# Altium PCB golgi_botV2.PcbDoc
Units mil, origin at the board's own origin, x right, y up, seen from the top; angles counter-clockwise.
Board outline 2900 x 4005 mil, 2 copper layers (Top Layer, Bottom Layer); 27 components, 37 nets, 124 pads, 27 vias.
Unrouted connection lines stored in the file: 2.
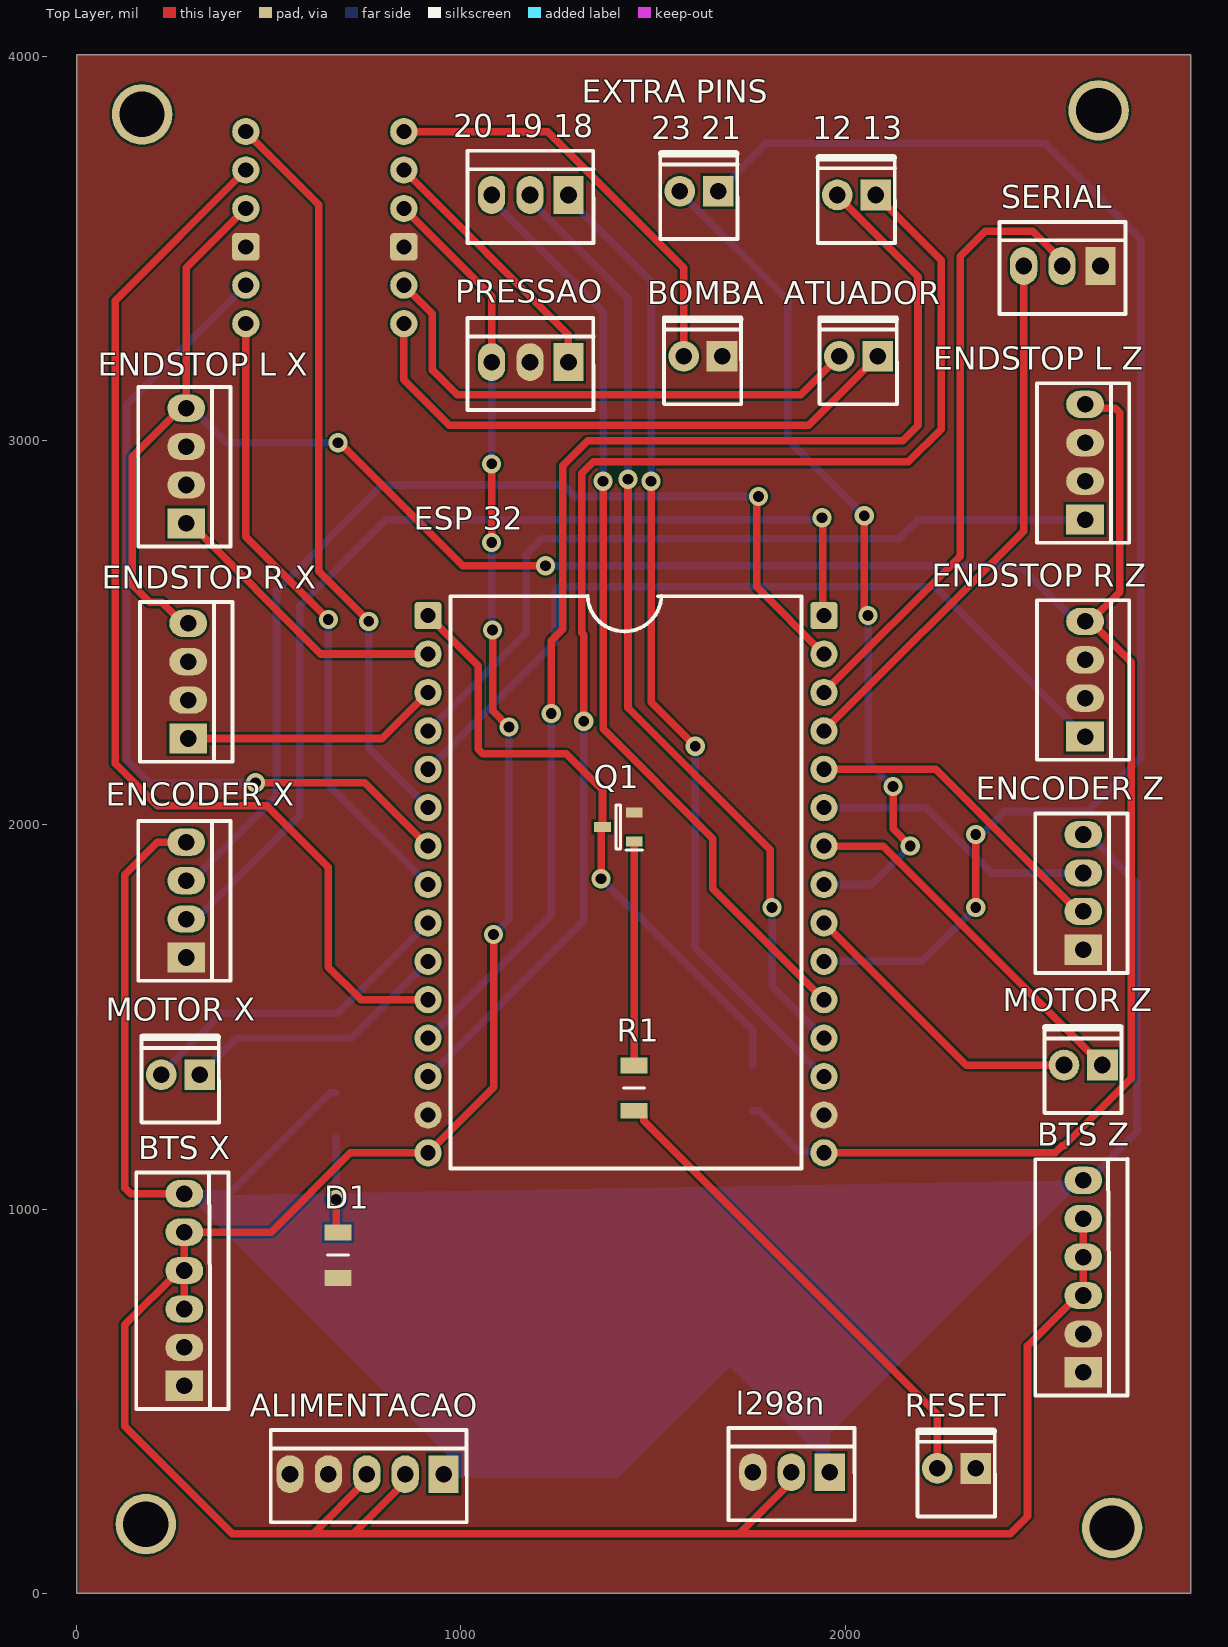
[diagram p0: Top Layer view]
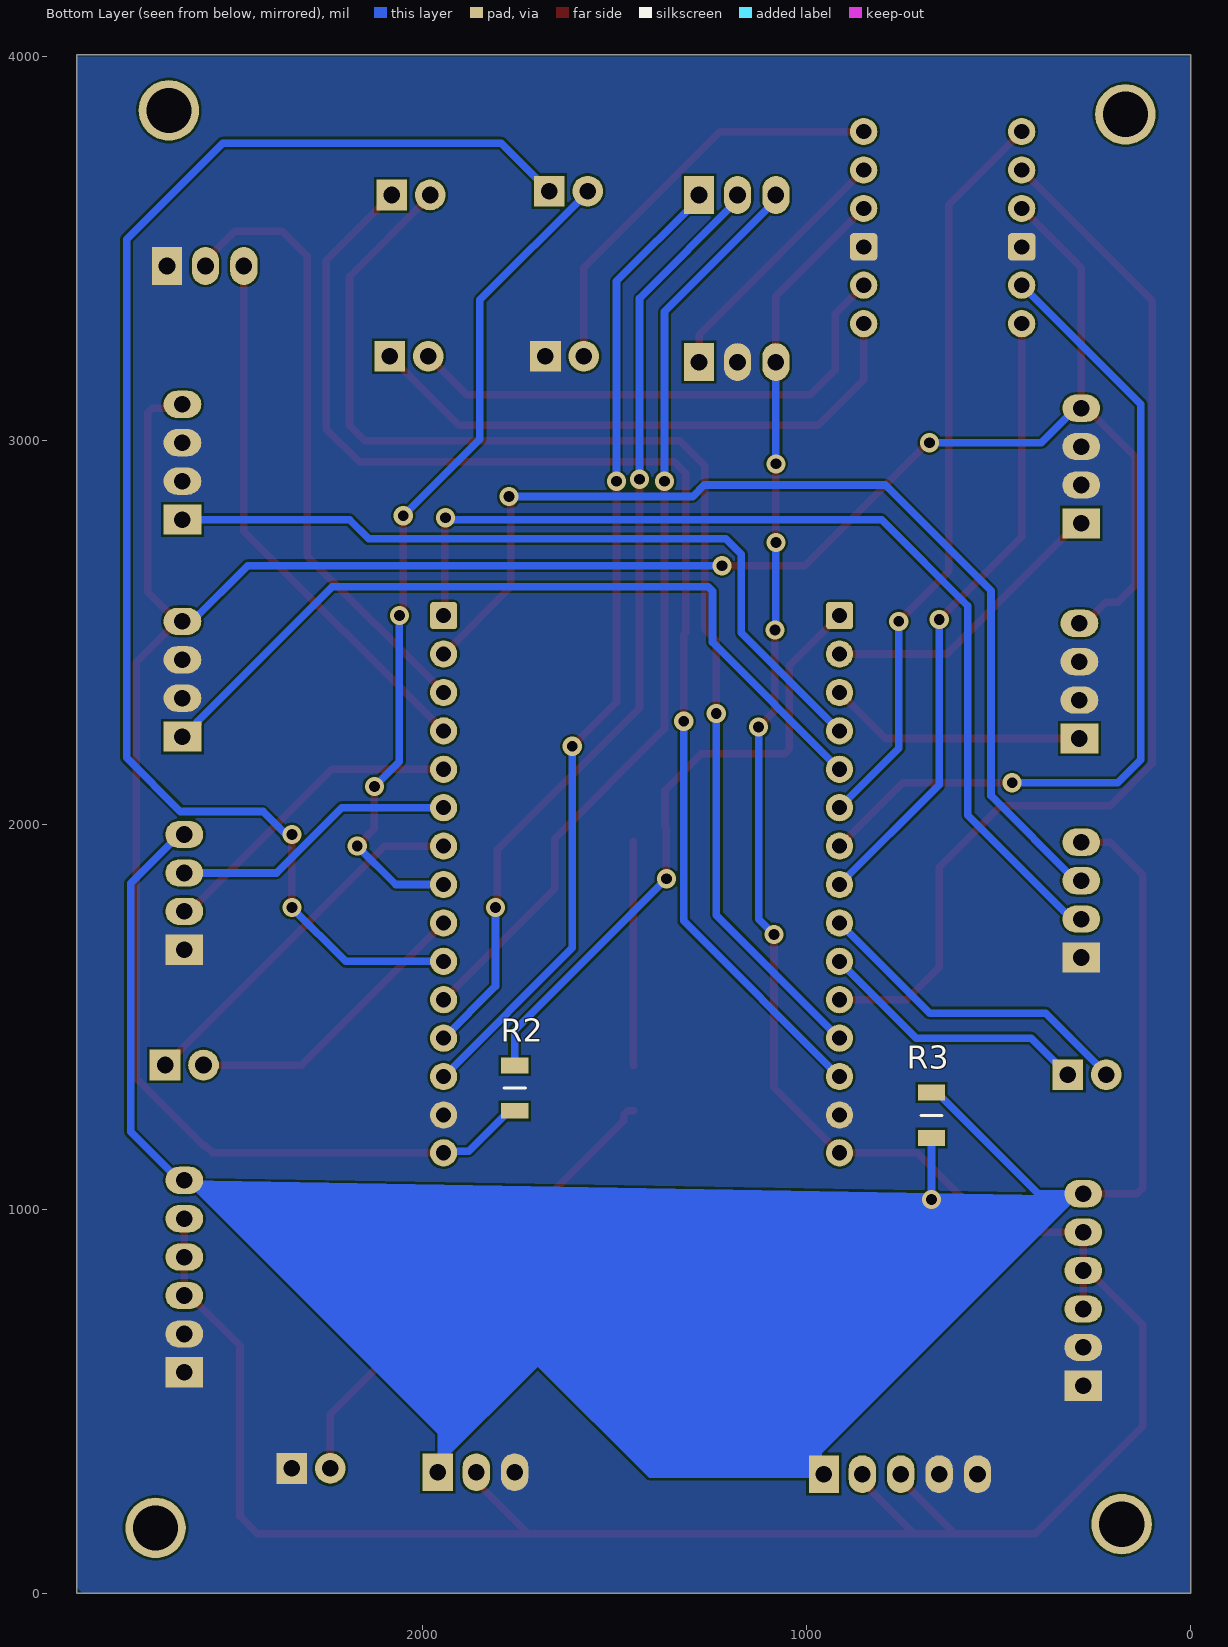
[diagram p1: Bottom Layer view, seen from below]

## Layer stack, top to bottom
Top Solder: solder mask 0.4, Solder Resist, Dk 3.5
Top Layer: signal copper 1.4
Dielectric 1: dielectric 12.6, FR-4, Dk 4.8
Bottom Layer: signal copper 1.4
Bottom Solder: solder mask 0.4, Solder Resist, Dk 3.5

## Board outline
0,0 2900,0 2900,4005 0,4005

## Design rules (kind name [scope] priority, off if disabled: settings)
Clearance [All] p1: gap=5.98 ignorepadtopadclearanceinfootprint=FALSE except(0: Arc-Hole Track-Hole SMDPad-Hole THPad-Hole Via-Hole Fill-Hole Poly-Hole Region-Hole Text-Hole)
ComponentClearance [All] p1: gap=3.94 collisioncheckmode=3 verticalgap=3.94 showdistances=FALSE
MinimumSolderMaskSliver [All] p1: minsoldermaskwidth=3.94
PolygonConnect [All] p1: connectstyle=Direct reliefconductorwidth=10 reliefentries=4 polygonreliefangle="90 Angle" airgapwidth=10
RoutingVias [All] p1: holewidth=15.75 width=31.5 viastyle="Through Hole" minholewidth=11.81 minwidth=23.62 maxholewidth=19.68 maxwidth=39.37
SilkToSilkClearance [All] p1: silktosilkclearance=0
SilkToSolderMaskClearance [IsPad] p1: minsilkscreentomaskgap=0 clearancetoexposedcopper=TRUE
SolderMaskExpansion [All] p1: expansion=3.15 istentingtop=FALSE
Width [All] p1: maxlimit=39.37 minlimit=11.81 preferedwidth=19.68
26 further rules are at their usual default settings.

## Components (designator, comment, footprint, x,y, rotation, side; value= is the part's Value field where it differs from the comment)
"12 13" "KK_2.54_2vias" KK_2VIAS_180º 2080,3640 r180 top (schematic designator "D12 D13")
"20 19 18" "KK_2.54_3vias" KK_3vias_180º 1280,3640 r180 top (schematic designator "D4 D2 D15")
"23 21" "KK_2.54_2vias" KK_2VIAS_180º 1670,3650 r180 top (schematic designator "D5 RX2")
ALIMENTACAO "KK_2.54_5vias" KK_5vias_180° 955,310 r180 top
ATUADOR "KK_2.54_2vias" KK_2VIAS_180º 2085,3220 r180 top
BOMBA "KK_2.54_2vias" KK_2VIAS_180º 1680,3220 r180 top
"BTS X" "KK_2.54_6vias" KK_6vias_180° 280,540 r90 top
"BTS Z" "KK_2.54_6vias" KK_6vias_180° 2620,575 r90 top
D1 "LED 3MM RED" "LED RED" 680,880 r270 top
"ENCODER X" "KK_2.54_4vias" KK_4vias_180° 285,1655 r90 top
"ENCODER Z" "KK_2.54_4vias" KK_4vias_180° 2620,1675 r90 top
"ENDSTOP L X" "KK_2.54_4vias" KK_4vias_180° 285,2785 r90 top
"ENDSTOP L Z" "KK_2.54_4vias" KK_4vias_180° 2625,2795 r90 top
"ENDSTOP R X" "KK_2.54_4vias" KK_4vias_180° 290,2225 r90 top
"ENDSTOP R Z" "KK_2.54_4vias" KK_4vias_180° 2625,2230 r90 top
"ESP 32" "microcontrolador" ESP32_Desvikit_v1 914.49,2545 r0 top value="ESP32 Desvikit V1"
l298n "KK_2.54_3vias" KK_3vias_180º 1960,315 r180 top
"MOTOR X" "KK_2.54_2vias" KK_2VIAS_180º 320,1350 r180 top
"MOTOR Z" "KK_2.54_2vias" KK_2VIAS_180º 2670,1375 r180 top
PRESSAO "KK_2.54_3vias" KK_3vias_180º 1280,3205 r180 top (schematic designator "SENSOR DE PRESSAO")
Q1 "Trans BC817" SOT96P240X110-3N 1410,1995 r180 top
R1 "2k2" RESC3216X60N 1450.28,1315 r270 top
R2 "2k2" RESC3216X60N 1760,1315 r270 bottom
R3 "680R" RESC3216X60N 674.72,1244.06 r270 bottom
RESET "KK_2.54_2vias" KK_2VIAS_180º 2340,325 r180 top
SERIAL "KK_2.54_3vias" KK_3vias_180º 2665,3455 r180 top
? "Conversor de nível logico 4 canais" "Conversor de nível lógico 4 canais" 383.9,3298.11 r0 top

## Footprints (in the part's own frame and the unit in brackets; to place one, negate y for a bottom-side part, rotate by r counter-clockwise, add the part's x,y. Pads: shape width x height; smd on the part's side, far side on the other; paste and mask are expansions set on the pad)
"Conversor de nível lógico 4 canais" [mm]
  round 1.8 hole 1: 1(1.425,12.875) 2(1.425,10.335) 3(1.425,7.795) 5(1.425,2.715) 6(1.425,0.175) 7(11.875,12.875) 8(11.875,10.335) 9(11.875,7.795) 11(11.875,2.715) 12(11.875,0.175)
  rrect25% 1.8x1.8 hole 1: 4(1.425,5.255) 10(11.875,5.255)
  body extent 0.14,-1.37 13.13,14.37, height 10.85
ESP32_Desvikit_v1 [mm]
  rrect25% 1.8x1.8 hole 1: 1(0,0) 30(26.175,0)
  round 1.8 hole 1: 2(0,-2.54) 3(0,-5.08) 4(0,-7.62) 5(0,-10.16) 6(0,-12.7) 7(0,-15.24) 8(0,-17.78) 9(0,-20.32) 10(0,-22.86) 11(0,-25.4) 12(0,-27.94) 13(0,-30.48) 14(0,-33.02) 15(0,-35.52) 16(26.175,-35.52) 17(26.175,-33.02) 18(26.175,-30.48) 19(26.175,-27.94) 20(26.175,-25.4) 21(26.175,-22.86) 22(26.175,-20.32) 23(26.175,-17.78) 24(26.175,-15.24) 25(26.175,-12.7) 26(26.175,-10.16) 27(26.175,-7.62) 28(26.175,-5.08) 29(26.175,-2.54)
  silkscreen extent 1.47,-36.57 24.69,1.31, body extent -1.2,-46.03 27.4,4.9, height 15.1
KK_2VIAS_180º [mil]
  rect 80x80 hole 43.31: 1(0,0)
  round 80 hole 43.31: 2(100,0)
  silkscreen extent -50,-101 151,125, body extent -61,-108 165,128, height 464
KK_3vias_180º [mm]
  rect 2x2.5 hole 1.1: 1(0,0)
  oval 1.8x2.5 hole 1.1: 2(2.54,0) 3(5.08,0)
  silkscreen extent -1.65,-2.92 6.69,3.18, body extent -1.6,-2.95 6.69,3.05, height 11.9
KK_4vias_180° [mm]
  rect 2x2.5 hole 1.1: 1(0,0)
  oval 1.8x2.5 hole 1.1: 2(2.54,0) 3(5.08,0) 4(7.62,0)
  silkscreen extent -1.53,-2.92 9.02,3.18, body extent -1.4,-2.79 8.76,3.01, height 10.12
KK_5vias_180° [mm]
  rect 2x2.5 hole 1.1: 1(0,0)
  oval 1.8x2.5 hole 1.1: 2(2.54,0) 3(5.08,0) 4(7.62,0) 5(10.16,0)
  silkscreen extent -1.53,-2.92 11.43,3.18, body extent -1.4,-2.79 11.3,3.01, height 10.12
KK_6vias_180° [mm]
  rect 2x2.5 hole 1.1: 1(0,0)
  oval 1.8x2.5 hole 1.1: 2(2.54,0) 3(5.08,0) 4(7.62,0) 5(10.16,0) 6(12.7,0)
  silkscreen extent -1.53,-2.92 14.11,3.18, body extent -1.4,-2.79 13.84,3.05, height 10.1
"LED RED" [mm]
  rect 1.05x1.8 smd: 1(-1.5,0) 2(1.5,0)
  silkscreen extent 0,-0.7 0,0.7, body extent -0.79,-0.43 0.81,0.37, height 0.75
RESC3216X60N [mm]
  rect 1.05x1.8 smd: 1(-1.5,0) 2(1.5,0)
  silkscreen extent 0,-0.7 0,0.7, body extent -1.58,-0.8 1.58,0.8, height 0.6
SOT96P240X110-3N [mm]
  rect 1.1x0.65 smd: 1(-1.05,0.96) 2(-1.05,-0.96) 3(1.05,0)
  silkscreen extent -1.6,-1.45 0.15,1.54, body extent -1.2,-1.45 1.2,1.45, height 1.1

## Part data
"12 13" "23 21" ATUADOR BOMBA "MOTOR X" "MOTOR Z" RESET: "Conector KK 2.54mm 2 vias", Descrição="Conector KK 3 vias com passo 2.54mm", Encapsulamento="PTH - 180º", Modelo="2 vias - 180º", Valor="KK 2 vias 180º"
"20 19 18" l298n PRESSAO SERIAL: "Conector KK 2.54mm 3 vias", Descrição="Conector KK 3 vias com passo 2.54mm", Encapsulamento="PTH - 180º", Modelo="3 vias - 180º", Valor="KK 3 vias 180º"
ALIMENTACAO: "Conector KK 2.54mm 5 vias", Descrição="Conector KK 3 vias com passo 2.54mm", Encapsulamento="PTH - 180º", Modelo="3 vias - 180º", Valor="KK 5 vias 180º"
"BTS X" "BTS Z": "Conector KK 2.54mm 6 vias", Descrição="Conector KK 3 vias com passo 2.54mm", Encapsulamento="PTH - 180º", Modelo="3 vias - 180º", Valor="KK 6 vias 180º"
D1: Current If Luminous Intensity=2, Forward Current If=20, Forward Voltage VF Max=2.5, LED Colour=Red, Manufacturer=Paralight, Manufacturer Part Number=IMP585, Operating Temperature Max=85, Operating Temperature Min=-40, Operating Temperature Range="-40°C to +85", Peak Forward Current=7, Supplier Part Number 1="Led 3mm Vermelho Difuso L-314HD - Paralight", Voltage Vf Typ="2.2V<!--FANDB--><div class=\"features-and-benefits-container\"><div class=\"features-and-benefits-description\"><span class=\"features-benefits-value\">The L-934LID from Kingbright is a through hole round shape high efficiency red colour LED. The device is made of gallium arsenide phosphide on gallium phosphide orange light emitting diode. This LED is widely used because of low power consumption, long life and solid state reliability.</span></div><div class=\"features-and-benefits-list\"><ul class=\"features-and-benefits-list-list\"><li class=\"features-and-benefits-list-item\">Standard bulb size of T-1 (3mm)</li><li class=\"features-and-benefits-list-item\">Reliable and rugged</li><li class=\"features-and-benefits-list-item\">Viewing angle is 60°</li><li class=\"features-and-benefits-list-item\">Luminous intensity of 3mcd at 2mA</li><li class=\"features-and-benefits-list-item\">Forward voltage is 2.0V</li><li class=\"features-and-benefits-list-item\">Forward current (If) is 20mA</li><li class=\"features-and-benefits-list-item\">Dominant wavelength is 625nm at IF=20mA</li><li class=\"features-and-benefits-list-item\">Peak wavelength is 627nm at IF=20", Bulb Size=3mm, ComponentLink1Description=http://loja.multcomercial.com.br/led-3mm-vermelho-difuso-l-314hd-paralight.html, ComponentLink1URL=http://loja.multcomercial.com.br/led-3mm-vermelho-difuso-l-314hd-paralight.html, Dominant Wavelength=625, External Diameter=2.9, External Length / Height=4.6, Forward Current If Max=20, Forward Voltage=2, Lead Cross-section Depth=0.5, Lead Cross-section Width=0.5, Lead Spacing=2.54, LED / Lamp Size="3mm / T-1", LED Mounting="Through Hole", LED Type=Standard, Lens Shape=Round, Luminous Intensity=3, Luminous Intensity @ If Min=0.7, Luminous Intensity Typ=3, Mounting Type="PCB Through Hole", MSL=-, No. of Pins=2, Packaging=Each, Peak Wavelength=625, PIV Max=5, Pricing 1="1=0.15 (BRL)", RoHS=YES, Stock 1=35260, Supplier 1="Mult Comercial", SVHC="No SVHC (15-Jun-2015)", Viewing Angle=60°, Wavelength Typ=625
"ENCODER X" "ENCODER Z" "ENDSTOP L X" "ENDSTOP L Z" "ENDSTOP R X" "ENDSTOP R Z": "Conector KK 2.54mm 4 vias", Descrição="Conector KK 3 vias com passo 2.54mm", Encapsulamento="PTH - 180º", Modelo="3 vias - 180º", Valor="KK 4 vias 180º"
"ESP 32": library part "ESP32 Desvikit v1", "microcontrolador com moculo bluethoth e wifi"
Q1: "Transistor BJT NPN BC817-25-7-F", Arrow Part Number=BC817-25-7-F, Manufacturer_Name="Diodes Inc.", Mouser Part Number=621-BC817-25-7-F, Arrow Price/Stock=https://www.arrow.com/en/products/bc817-25-7-f/diodes-incorporated, Datasheet Link=https://www.diodes.com/assets/Datasheets/ds11107.pdf, Height=1.1mm, Manufacturer_Part_Number=BC817-25-7-F, Mouser Price/Stock=https://www.mouser.co.uk/ProductDetail/Diodes-Incorporated/BC817-25-7-F?qs=rGAXPo9uwV0jK0EyLZnqOw%3D%3D
R1 R2 R3: library part "Resistor 1206", "Resistor", Arrow Part Number=CRCW12064K70FKEA, Manufacturer_Name=Vishay, Mouser Part Number=71-CRCW1206-4.7K-E3, Arrow Price/Stock=https://www.arrow.com/en/products/crcw12064k70fkea/vishay, Datasheet Link=http://docs-emea.rs-online.com/webdocs/13ec/0900766b813ecc08.pdf, Height=0.6mm, Manufacturer_Part_Number=CRCW12064K70FKEA, Mouser Price/Stock=https://www.mouser.co.uk/ProductDetail/Vishay-Dale/CRCW12064K70FKEA?qs=1vm4qhDHCvlKJmatsKzyFQ%3D%3D

## Free pads (board coordinates)
  round 157.48 hole 118.11: 1(180,180) 2(2695,170) 3(2660,3860) 4(170,3850)

## Via types
v1: diameter 50, hole 28, Top Layer to Bottom Layer, 27 vias

## Nets (pads, with @x,y where several pads share a name; then routed paths per layer and width w, separated by ;. In a path a pad name is that pad's centre, name@x,y a point inside that pad or via, vN(x,y) a via of type N, cw(c..) or ccw(c..) an arc to the next point about the centre after c; other vN are vias at no path point)
+3V3: "ENDSTOP L X.4" "ENDSTOP L Z.4" "ENDSTOP R X.4" "ENDSTOP R Z.4" "ESP 32.16" ?.3 R2.2 | length 6928.4
  Top Layer w19.68: 290,2525 276.22,2525 221.32,2579.9 190.1,2579.9 145,2625 145,2958.78 271.22,3085 285,3085 285,3450 ?.3 ; v1@680,3000 1005,2675 v1(1220,2675) ; 1945,1146.57 2546.57,1146.57 2565,1165 2570,1165 2745,1340 2745,2423.78 2638.78,2530 ; 2625,2530 2638.78,2530 ; 2652.63,3095 2625,3095 2634.79,3085.21 2703.26,3085.21 2715,3073.47 2715,2606.22 2638.78,2530
  Bottom Layer w19.68: 285,3085 298.78,3085 388.78,2995 v1(680,2995) ; v1(1220,2675) 2455,2675 2600,2530 2625,2530 ; R2.2 1774.76,1255.94 1880.04,1150.67 1940.91,1150.67 1945,1146.57
+5: "BTS X.3" "BTS X.4" "BTS X.5" "BTS Z.3" "BTS Z.4" "BTS Z.5" "ESP 32.15" ?.9 ALIMENTACAO.2 ALIMENTACAO.3 l298n.2 PRESSAO.3 | length 8027.4
  Top Layer w19.68: 280,740 280,840 ; ALIMENTACAO.3 755,295 615,155 ; ?.9 1080,3376.42 PRESSAO.3 ; ALIMENTACAO.2 855,290 720,155 ; v1(1080,2735) v1(1080,2940) ; v1(1082.5,2507.5) 1082.5,2297.5 v1(1125,2255) ; v1(1085,1715) 1085,1317.09 914.49,1146.57 712.32,1146.57 505.74,940 280,940 280,840 ; l298n.2 1860,290 1725,155 ; 2620,975 2620,875 2620,775 2606.22,775 2475,643.78 2475,200 2430,155 1725,155 ; 280,840 266.22,840 125,698.78 125,435 405,155 615,155 ; 615,155 720,155 ; 720,155 1725,155
  Bottom Layer w19.68: v1(1080,2735) 1080,2510 v1(1082.5,2507.5) v1@1085,2505 ; v1(1080,2940) PRESSAO.3 ; v1(1085,1715) 1125,1755 v1(1125,2255)
+12: "BTS X.6" "BTS Z.6" "ENCODER X.4" "ENCODER Z.4" ALIMENTACAO.1 l298n.1 R3.1 | length 2707.3
  Top Layer w19.68: 280,1040 140,1040 125,1055 125,1870 210,1955 285,1955
  Bottom Layer w19.68: 280,1040 396.85,1040 659.96,1303.11 R3.1 ; 2620,1075 2633.78,1075 2760,1201.22 2760,1848.78 2633.78,1975 2620,1975
atuador_l: "ESP 32.8" ?.6 | length 1656.5
  Top Layer w19.68: ?.6 440,2750 v1(655,2535)
  Bottom Layer w19.68: v1(655,2535) 655,2104.49 914.49,1845
atuador_r: "ESP 32.7" ?.5 | length 2241.1
  Top Layer w19.68: v1(465,2110) 749.49,2110 914.49,1945
  Bottom Layer w19.68: ?.5 130,3095 130,2170 190,2110 v1(465,2110)
bomba: "ESP 32.6" ?.1 | length 1956.5
  Top Layer w19.68: ?.1 630,3615 630,2660 v1(760,2530)
  Bottom Layer w19.68: v1(760,2530) 760,2199.49 914.49,2045
D2: "20 19 18.2" "ESP 32.19" | length 2504.8
  Top Layer w19.68: v1(1435,2900) 1435,2305 1805,1935 v1@1805,1790
  Bottom Layer w19.68: 1180,3640 1180,3626.22 1435,3371.22 v1(1435,2900) ; v1(1810,1785) 1810,1580 1945,1445
D4: "20 19 18.3" "ESP 32.20" | length 2453.3
  Top Layer w19.68: v1(1370,2895) 1370,2250 1655.5,1964.5 1655.5,1834.5 1945,1545
  Bottom Layer w19.68: 1080,3640 1080,3626.22 1370,3336.22 v1(1370,2895)
D5: "23 21.2" "ESP 32.23" | length 2219.9
  Top Layer w19.68: v1(2050,2805) 2050,2555 v1(2060,2545) ; v1(2125,2100) 2125,1990 v1(2170,1945)
  Bottom Layer w19.68: 1570,3650 1570,3647.62 1850.77,3366.85 1850.77,3004.23 v1(2050,2805) ; 1945,1845 2070,1845 v1(2170,1945) ; v1(2060,2545) 2060,2165 v1(2125,2100)
D12: "12 13.2" "ESP 32.12" | length 3290.7
  Top Layer w19.68: v1(1235,2290) 1235,2480 1265,2510 1265,2935 1330,3000 2150,3000 2190,3040 2190,3427.62 1980,3637.62 1980,3640
  Bottom Layer w19.68: 914.49,1445 1235,1765.51 v1(1235,2290)
D13: "12 13.1" "ESP 32.13" | length 3403.1
  Top Layer w19.68: v1(1320,2270) 1320,2495 1315,2500 1315,2915 1345,2945 2165,2945 2250,3030 2250,3470 2080,3640
  Bottom Layer w19.68: 914.49,1345 1320,1750.51 v1(1320,2270)
D15: "20 19 18.1" "ESP 32.18" | length 2570.5
  Top Layer w19.68: v1(1495,2895) 1495,2320 v1(1610,2205)
  Bottom Layer w19.68: 1280,3640 1280,3630.16 1495,3415.16 v1(1495,2895) ; v1(1610,2205) 1610,1680 1945,1345
en: "ESP 32.1" Q1.3 R2.1 | length 1652.3
  Top Layer w19.68: 914.49,2545 1045,2414.49 1045,2196.53 1056.53,2185 1274.49,2185 1368.66,2090.83 Q1.3 1367.95,1995 1365,1992.05 v1(1365,1860)
  Bottom Layer w19.68: v1(1365,1860) 1760,1465 R2.1
encoder_a_x: "ENCODER X.3" "ESP 32.29" | length 2726.3
  Top Layer w19.68: v1(1775,2855) 1770,2850 1770,2620 1945,2445
  Bottom Layer w19.68: 285,1855 298.78,1855 520,2076.22 520,2610 795,2885 1265.9,2885 1295.9,2855 v1(1775,2855)
encoder_a_z: "ENCODER Z.3" "ESP 32.25" | length 745.4
  Bottom Layer w19.68: 1945,2045 2210,2045 2380,1875 2620,1875
encoder_b_x: "ENCODER X.2" "ESP 32.30" | length 2664.2
  Top Layer w19.68: v1(1940,2800) 1942.5,2797.5 1942.5,2547.5 1945,2545
  Bottom Layer w19.68: 285,1755 310,1755 580,2025 580,2570 805,2795 1935,2795 v1(1940,2800)
encoder_b_z: "ENCODER Z.2" "ESP 32.26" | length 828.3
  Top Layer w19.68: 1945,2145 2236.22,2145 2606.22,1775 2620,1775
endstop_l_x: "ENDSTOP L X.1" "ESP 32.2" | length 770.3
  Top Layer w19.68: 285,2785 294.84,2785 634.84,2445 914.49,2445
endstop_l_z: "ENDSTOP L Z.1" "ESP 32.4" | length 2058.1
  Bottom Layer w19.68: 914.49,2245 1170,2500.51 1170,2705 1210,2745 2140,2745 2190,2795 2625,2795
endstop_r_x: "ENDSTOP R X.1" "ESP 32.3" | length 674.2
  Top Layer w19.68: 290,2225 794.49,2225 914.49,2345
endstop_r_z: "ENDSTOP R Z.1" "ESP 32.5" | length 2152.5
  Bottom Layer w19.68: 914.49,2145 1245,2475.51 1245,2608.47 1256.53,2620 2235,2620 2585.63,2269.37 2585.63,2259.53 2615.16,2230 2625,2230
GND: "BTS X.1" "BTS X.2" "BTS Z.1" "BTS Z.2" "ENCODER X.1" "ENCODER Z.1" "ENDSTOP L X.2" "ENDSTOP L X.3" "ENDSTOP L Z.2" "ENDSTOP L Z.3" "ENDSTOP R X.2" "ENDSTOP R X.3" "ENDSTOP R Z.2" "ENDSTOP R Z.3" "ESP 32.14" "ESP 32.17" ?.4 ?.10 ALIMENTACAO.4 ALIMENTACAO.5 BOMBA.1 D1.2 l298n.3 PRESSAO.2 Q1.2 RESET.1 SERIAL.1
motor_l_x: "ESP 32.10" "MOTOR X.1" | length 716.7
  Bottom Layer w19.68: 320,1350 415,1445 714.49,1445 914.49,1645
motor_l_z: "ESP 32.24" "MOTOR Z.1" | length 961.1
  Top Layer w19.68: 1945,1945 2100,1945 2670,1375
motor_r_x: "ESP 32.9" "MOTOR X.2" | length 866.4
  Top Layer w19.68: 220,1350 220,1352.38 ; 910,1745 914.49,1745
  Bottom Layer w19.68: 220,1350 220,1352.38 377.62,1510 679.49,1510 914.49,1745
motor_r_z: "ESP 32.22" "MOTOR Z.2" | length 778.3
  Top Layer w19.68: 1945,1745 2315,1375 2570,1375
Net_7: ?.7 BOMBA.2 | length 1106.2
  Top Layer w19.68: ?.7 1225.97,3805 1580,3450.97 BOMBA.2
Net_8: ?.8 PRESSAO.1 | length 677.5
  Top Layer w19.68: ?.8 1280,3276.42 PRESSAO.1
Net_11: ?.11 ATUADOR.2 | length 1380.9
  Top Layer w19.68: ?.11@849.34,3405 ?.11 925.61,3330.81 925.61,3184.39 990,3120 1885,3120 ATUADOR.2
Net_12: ?.12 ATUADOR.1 | length 1503.7
  Top Layer w19.68: ?.12 851.42,3158.58 970,3040 1905,3040 ATUADOR.1
NetD1_1: D1.1 R3.2 | length 223.1
  Top Layer w19.68: v1(675,1025) 675,944.06 D1.1
  Bottom Layer w19.68: R3.2 675,1184.72 675,1050
NetQ1_1: Q1.1 R1.1 | length 583.6
  Top Layer w19.68: R1.1 1451.34,1375.12 Q1.1
NetR1_2: R1.2 RESET.2 | length 1266.7
  Top Layer w19.68: R1.2 1465.04,1255.94 1475.87,1245.12 1475.87,1230.35 2240,466.22 RESET.2
RX: "ESP 32.27" SERIAL.3 | length 1425.4
  Top Layer w19.68: 1945,2245 2465,2765 SERIAL.3
RX2: "23 21.1" "ESP 32.21" | length 3761.2
  Top Layer w19.68: v1(2340,1785) v1(2340,1975)
  Bottom Layer w19.68: 1670,3650 1795,3775 2520,3775 2770,3525 2770,2175 2630,2035 2415,2035 2355,1975 v1(2340,1975) ; 1945,1645 2200,1645 v1(2340,1785)
"sensor de pressao": "ESP 32.11" ?.2 | length 2907.4
  Top Layer w19.68: ?.2 100,3365 100,2160 210,2050 495,2050 655,1890 655,1630 740,1545 914.49,1545
TX: "ESP 32.28" SERIAL.2 | length 1619.3
  Top Layer w19.68: 1945,2345 2300,2700 2300,3480 2365,3545 2488.78,3545 2565,3468.78 SERIAL.2

## Polygon pours and split planes (outlines as drawn)
GND on Bottom Layer "GND_L02_P001" (solid, pour order 1): 0,4000 2900,4000 2900,15 2885,0 0,0
GND on Top Layer "GND_L01_P000" (solid, pour order 0): 0,4000 5,4005 2900,4005 2900,5 2895,0 5,0

## Other copper
Bottom Layer:
  region net +12: 290,1035 960,365 960,300 1410,300 1700,590 1960,330 1960,415 2620,1075

## Silkscreen, mask and mechanical layers (free items; w line width, h text height)
Top Overlay:
  text "EXTRA PINS" at 1315,3880 h60